# Altium PCB Rackmount_DSP.PcbDoc (part 18 of 24)
Units mil, origin at the board's own origin, x right, y up, seen from the top; angles counter-clockwise.
Board outline 10629.92 x 8267.72 mil, 4 copper layers (Top Layer, Mid Layer 1, Mid Layer 2, Bottom Layer), stack 36.2 mil thick; 4500 components, 1565 nets, 9765 pads, 3289 vias.
Unrouted connection lines stored in the file: 1.
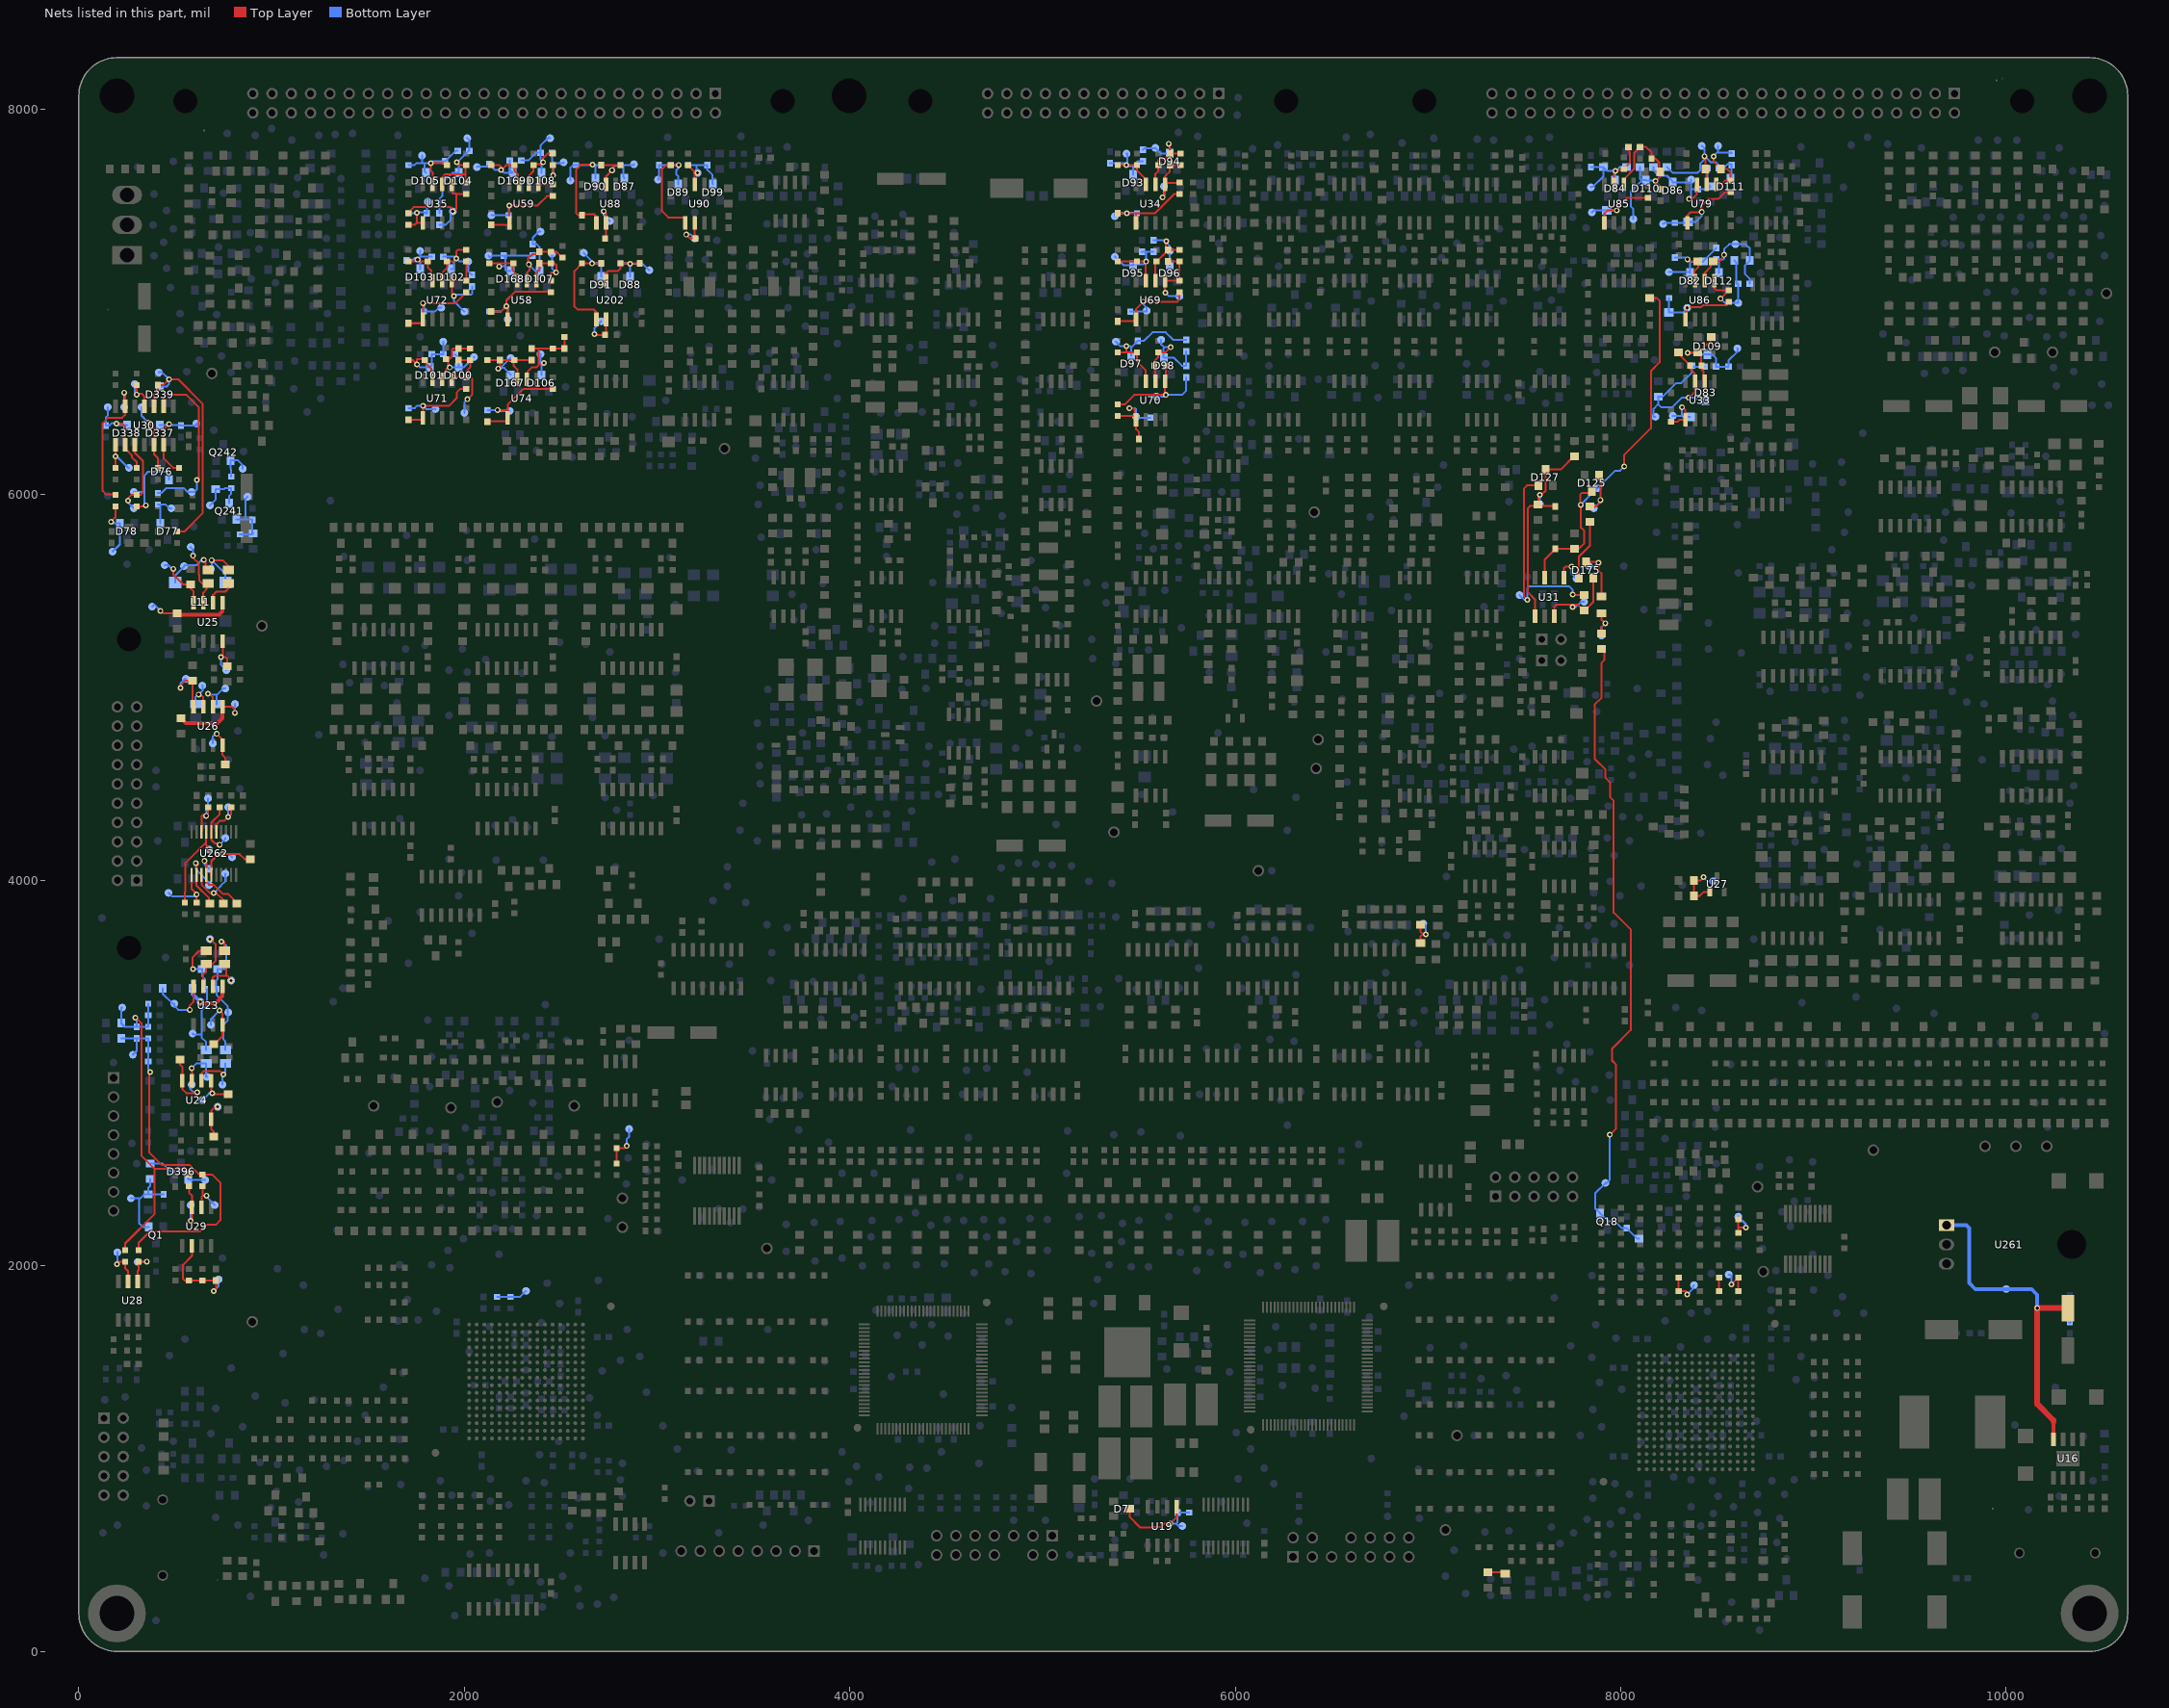
[diagram p20: the nets of this part, all layers, seen from the top]

## Via types
v1: diameter 30, hole 16, Top Layer to Bottom Layer, 3143 vias
v2: diameter 22, hole 12, Top Layer to Bottom Layer, 146 vias

## Nets (pads, with @x,y where several pads share a name; then routed paths per layer and width w, separated by ;. In a path a pad name is that pad's centre, name@x,y a point inside that pad or via, vN(x,y) a via of type N, cw(c..) or ccw(c..) an arc to the next point about the centre after c; other vN are vias at no path point) (continued)
XSIG082125: R893.1 TP944.1 U28.7 | length 214.3
  Top Layer w10: v1(197.95,2009.26) 208.7,2020 R893.1@240,2020 240,1988.52 255,1973.52 U28.7@255,1920
  Bottom Layer w10: v1(197.95,2009.26) 200,2011.3 TP944.1@200,2070
XSIG082126: R894.1 TP945.1 U28.6 | length 194.3
  Top Layer w10: U28.6@305,1920 305,1972.13 310,1977.13 R894.1@310,2020 350.4,2020 v1(352.66,2022.26)
  Bottom Layer w10: TP945.1@305,2020 350.4,2020 v1(352.66,2022.26)
XSIG082133: C518.1 R991.2 R992.2 TP946.1 U29.2 | length 497.9
  Top Layer w10: U29.2@586.63,2104.11 586.63,2051.32 540.63,2005.32 540.63,1931.56 548.07,1924.11 R991.2@571.63,1924.11 R992.2@641.63,1924.11 C518.1@711.63,1924.11 711.63,1881.26 v1(699.21,1868.85)
  Bottom Layer w10: v1(699.21,1868.85) 725,1894.63 TP946.1@725,1930
XSIG082140: R892.1 TP947.1 U29.7 | length 270.2
  Top Layer w10: R892.1@571.63,2414.11 571.63,2380.49 586.63,2365.49 U29.7@586.63,2304.11 586.63,2240.54 v1(580,2233.91)
  Bottom Layer w10: v1(580,2233.91) TP947.1@580,2315
XSIG082141: R891.1 TP948.1 U29.6 | length 200.5
  Top Layer w10: U29.6@636.63,2304.11 636.63,2357.09 643.65,2364.11 ; R891.1@641.63,2414.11 641.75,2414.11 641.75,2364.11 643.65,2364.11 ; v1(662.58,2364.11) 643.65,2364.11
  Bottom Layer w10: v1(662.58,2364.11) 662.58,2357.42 TP948.1@705,2315
XSIG082152: C431.1 C439.1 R867.1 R870.1 R892.2 R893.2 R1351.1 TP949.1 | length 1916.2
  Top Layer w10: R893.2@240,2080 240,2116.16 393.51,2269.67 393.51,2502.5 394.32,2502.5 ; v1(293.72,3286.97) 296.81,3286.97 324.82,3258.97 324.82,2572 394.32,2502.5 ; R892.2@571.63,2474.11 571.63,2489.51 558.64,2502.5 394.32,2502.5
  Bottom Layer w10: TP949.1@225,3340 221.86,3340 220,3338.14 R1351.1@220,3260 220,3257.5 237.5,3240 C439.1@300,3240 ; v1(293.72,3286.97) 300,3280.69 C439.1@300,3240 ; R867.1@360,3360 C431.1@360,3300 R870.1@360,3240 C439.1@300,3240
XSIG082161: C432.1 C439.2 R866.2 R869.2 R891.2 R894.2 R1350.1 TP950.1 | length 1973.8
  Top Layer w10: R894.2@310,2080 310,2119.13 369.88,2179.01 629.24,2179.01 663.03,2212.8 710.37,2212.8 733.83,2236.26 733.83,2431.97 691.69,2474.11 R891.2@641.63,2474.11 624.08,2474.11 575.55,2522.63 430.57,2522.63 365.94,2587.26 365.94,3005 v1(370.11,3005)
  Bottom Layer w10: R1350.1@220,3180 C439.2@300,3180 ; TP950.1@280,3095 300,3115 C439.2@300,3180 ; v1(370.11,3005) 360,3015.11 C432.1@360,3060 R869.2@360,3120 R866.2@360,3180 C439.2@300,3180
XSIG082179: C423.2 Q1.1 R961.1 R1378.1 TP951.1 | length 450.5
  Bottom Layer w10: TP951.1@270,2350 311.89,2350 ; Q1.1@362.5,2201.5 330.79,2201.5 312.73,2219.55 312.73,2349.16 311.89,2350 ; R961.1@370,2450 370,2415 360,2405 R1378.1@360,2370 ; C423.2@440,2370 R1378.1@360,2370 ; 311.89,2350 317.79,2350 337.79,2370 R1378.1@360,2370
XSIG082192: R2092.2 R2093.1 TP952.1 U27.1 | length 287.3
  Top Layer w10: v1(8429.39,4016.11) 8429.39,4014.39 8415,4000 R2093.1@8380,4000 R2092.2@8380,3920 8410.66,3920 8430.58,3939.92 U27.1@8462.6,3939.92
  Bottom Layer w10: v1(8429.39,4016.11) 8450.5,3995 TP952.1@8480,3995
XSIG082201: C329.2 D7.3 R759.2 TP953.1 U19.1 | length 574.2
  Top Layer w10: D7.3@5451.5,740 5451.5,697.97 5507.4,642.07 5572,642.07 5574.86,644.94 5612.91,644.94 5630.38,662.41 v1(5660.93,662.41) 5695,696.47 U19.1@5695,750
  Bottom Layer w10: v1(5660.93,662.41) 5693.65,662.41 ; TP953.1@5725,650 5706.06,650 5693.65,662.41 ; R759.2@5760,720 C329.2@5700,720 5700,668.75 5693.65,662.41
XSIG082216: D46.2 R1078.2 TP954.1 | length 184.1
  Top Layer w10: D46.2@6960,3673.5 6960,3708.5 6971.65,3720.15 v1@6973.93,3720.15 ; R1078.2@6960,3769.09 6960,3734.08 v1@6973.93,3720.15 ; v1(6988.49,3720.15) v1@6973.93,3720.15
  Bottom Layer w10: TP954.1@6975,3775 6975.99,3775 6988.49,3762.49 v1(6988.49,3720.15)
XSIG082219: D44.2 R864.1 | length 96.5
  Top Layer w10: R864.1@7310,410 7400,410 D44.2@7400,403.5
XSIG082226: C309.1 C916.1 R984.2 TP956.1 U16.8 U261.1 | length 1983.1
  Top Layer w9: 10244.96,1192.41 10245,1192.37
  Top Layer w20: U16.8@10245,1100 10245,1192.37
  Top Layer w30: 10244.96,1192.41 10244.96,1198.75 10161.2,1282.5 v1(10161.2,1780.24) C916.1@10320,1780.24
  Bottom Layer w20: U261.1@9690,2210 9793.12,2210 9807.26,2195.86 9807.26,1911.86 9839.12,1880 TP956.1@10000,1880 10131.3,1880 10161.2,1850.1 v1(10161.2,1780.24) 10284.24,1780.24 10294,1790 R984.2@10330,1790 C309.1@10330,1710
XSIG082228: D396.1 R961.2 TP1684.1 | length 334.2
  Bottom Layer w10: R961.2@370,2530 436.09,2530 476.09,2490 549.85,2490 567.5,2472.35 D396.1@567.5,2448.5 576.25,2448.5 579.75,2445 TP1684.1@655,2445
XSIG090590: R1311.2 TP1786.1 U24.4 | length 184.3
  Top Layer w10: R1311.2@700,2670 699.29,2670 699.29,2697.34 686.63,2710 U24.4@686.63,2760 686.63,2803.45 703.82,2820.64 720,2820.64 v1(720,2825)
XSIG090624: R2714.2 TP1899.1 U262.4 | length 370.3
  Top Layer w10: v1(651.26,4100.68) 661.61,4090.32 U262.4@661.61,4028.39 661.61,3990.76 674.99,3977.39 698.86,3977.39 746.51,3929.74 772.54,3929.74 820,3882.28 R2714.2@820,3880
  Bottom Layer w10: v1(651.26,4100.68) 651.26,4083.74 TP1899.1@675,4060
XSIG090625: R2713.2 TP1805.1 U262.5 | length 358.3
  Top Layer w10: U262.5@687.2,4028.39 687.2,4099 721.13,4132.92 744.69,4132.92 v1(744.69,4136.01) 833.72,4136.01 859.73,4110 R2713.2@890,4110
  Bottom Layer w10: v1(744.69,4136.01) 778.99,4136.01 TP1805.1@795,4120
XSIG090637: R2709.1 TP1804.1 U262.18 | length 253.1
  Top Layer w10: U262.18@636.02,4251.61 636.02,4332.43 643.44,4339.85 v1@660.48,4339.85 ; v1(660.48,4334.88) v1@660.48,4339.85 ; R2709.1@670,4380 670,4351.23 660.48,4341.71 v1@660.48,4339.85
  Bottom Layer w10: v1(660.48,4334.88) 663.26,4334.88 663.26,4374.02 670,4380.76 TP1804.1@670,4425
XSIG090638: R2710.1 TP1803.1 U262.17 | length 459.2
  Top Layer w10: R2710.1@550,3885 550,3940.38 553.39,3943.77 553.39,4090.86 660.63,4198.1 ; U262.17@661.61,4251.61 660.63,4251.61 660.63,4198.1 ; v1(675,4160) 675,4162.5 672.04,4162.5 672.04,4172.41 660.63,4183.82 660.63,4198.1
XSIG090639: R2711.1 TP1802.1 U262.16 | length 292.8
  Top Layer w10: R2711.1@730,4380 730,4342.45 687.2,4299.66 U262.16@687.2,4251.61 687.2,4209.33 705.04,4191.5 730.78,4191.5 v1(730.78,4185.06)
  Bottom Layer w10: v1(730.78,4185.06) 760,4214.28 TP1802.1@760,4220
XSIG090647: R1313.2 TP1798.1 U262.2 | length 391
  Top Layer w10: v1(606.11,4089.56) 607.45,4089.56 607.45,4090.27 617.13,4080.58 610.43,4073.88 U262.2@610.43,4028.39 610.43,3971.73 674.9,3907.27 674.9,3885.1 R1313.2@680,3880
  Bottom Layer w10: v1(606.11,4089.56) 606.11,4057.37 675,3988.48 TP1798.1@675,3975
XSIG090648: R2720.2 TP1799.1 U262.1 | length 312.3
  Top Layer w10: U262.1@584.84,4028.39 584.84,3955.14 611.95,3928.04 v1(610.94,3927.03) 610,3926.09 R2720.2@610,3885
  Bottom Layer w10: TP1799.1@465,3935 482.21,3917.79 601.7,3917.79 v1(610.94,3927.03)
XSIG090652: L14.2 L19.2 R1346.2 R1353.1 TP1900.1 | length 732.9
  Top Layer w10: v1(740.01,3681.93) 740.01,3687.02 744.95,3687.02 755,3676.97 L14.2@755,3634.5
  Bottom Layer w10: v1(740.01,3681.93) 740.01,3685.28 765.05,3660.23 765.05,3545.72 759.33,3540 R1353.1@720,3540 720,3488 712.7,3480.7 712.7,3435 R1346.2@715,3435 715,3404.28 773.11,3346.18 TP1900.1@773.11,3315 ; L19.2@760,3119.5 760,3163.83 750,3173.83 750,3250.63 773.11,3273.74 TP1900.1@773.11,3315 ; TP1900.1@775,3315 TP1900.1@773.11,3315
XSIG090659: R2715.2 TP1797.1 U262.3 | length 341.6
  Top Layer w10: U262.3@636.02,4028.39 636.02,3977.39 678.92,3934.49 699.24,3934.49 v1(700.1,3933.63) 713.53,3933.63 750,3897.15 R2715.2@750,3880
  Bottom Layer w10: v1(700.1,3933.63) 736.94,3970.47 736.94,3972.19 760,3995.25 TP1797.1@760,4035
XSIG090673: R1312.2 TP1796.1 U23.4 | length 293.4
  Top Layer w10: R1312.2@700,3150 702.5,3150 745,3192.5 U23.4@745,3250 745,3308.43 v1(729.21,3324.22)
  Bottom Layer w10: TP1796.1@685,3250 685,3280.01 v1(729.21,3324.22)
XSIG090685: R2717.1 TP1878.1 U24.8 | length 330.8
  Top Layer w10: R2717.1@525,3070 525,3043.71 536.63,3032.08 U24.8@536.63,2960 536.63,2916.56 557.58,2895.6 613.65,2895.6 v1(613.65,2900.18)
  Bottom Layer w10: TP1878.1@585,2940 576.69,2931.69 576.69,2919.28 605.17,2890.8 613.65,2890.8 v1(613.65,2900.18)
XSIG090687: R2719.1 TP1879.1 U23.8 | length 342.5
  Top Layer w10: v1(575.77,3328.2) 574.67,3328.2 574.67,3350.93 575.04,3350.93 595,3370.89 U23.8@595,3450
  Bottom Layer w10: R2719.1@435,3440 435,3410.46 485.46,3360 TP1879.1@495,3360 495,3348.85 515.65,3328.2 v1(575.77,3328.2)
XSIG090692: R2712.1 TP1880.1 U262.15 | length 234
  Top Layer w10: U262.15@712.8,4251.61 712.8,4289.24 731.85,4308.29 753.68,4308.29 v1(774.89,4329.51) 780.08,4329.51 780.08,4334.03 790,4343.95 R2712.1@790,4380
  Bottom Layer w10: v1(774.89,4329.51) 780.08,4329.51 775,4334.59 TP1880.1@775,4380
XSIG090710: L16.1 TP1801.1 U24.7 | length 226.2
  Top Layer w10: v1(585.73,3025.9) 586.63,3025.01 U24.7@586.63,2960
  Bottom Layer w10: v1(585.73,3025.9) 610.33,3050.5 L16.1@660,3050.5 660,2980 TP1801.1@665,2980
XSIG090711: L19.1 TP1800.1 U24.6 | length 281.1
  Top Layer w10: U24.6@636.63,2960 636.63,2999.79 646.84,3010 732.59,3010 v1(749.86,2992.74)
  Bottom Layer w10: TP1800.1@745,2940 745,2987.88 v1(749.86,2992.74) 760,3002.88 L19.1@760,3050.5
XSIG090714: L15.2 L16.2 R1346.1 R1352.1 TP1901.1 | length 711.3
  Top Layer w10: v1(592.37,3540.32) 592.37,3539.23 589.41,3539.23 589.41,3599.27 624.64,3634.5 L15.2@660,3634.5
  Bottom Layer w10: TP1901.1@590,3205 595.14,3199.86 636.9,3199.86 ; v1(592.37,3540.32) 592.37,3539.23 589.41,3539.23 590.18,3540 R1352.1@640,3540 640,3501.55 655,3486.55 R1346.1@655,3435 665.07,3435 665.07,3352.49 636.9,3324.32 636.9,3199.86 ; L16.2@660,3119.5 660,3161.09 636.9,3184.2 636.9,3199.86
XSIG090715: L15.1 TP1902.1 U23.7 | length 305.9
  Top Layer w10: U23.7@645,3450 645,3513.5 660,3528.5 L15.1@660,3565.5 693.35,3565.5 708.86,3581.01 708.86,3668.86 685.13,3692.59 680,3692.59 v1(680,3695)
XSIG090716: L14.1 TP1903.1 U23.6 | length 226.2
  Top Layer w10: U23.6@695,3450 695,3496.35 702.67,3504.02 765.26,3504.02 765.51,3504.27 ; L14.1@755,3565.5 765.51,3554.99 765.51,3504.27 ; v1(790,3480) 791.15,3480 791.15,3486.22 773.1,3504.27 765.51,3504.27
XSIG090719: R3009.1 TP1926.1 U24.5 | length 219.1
  Top Layer w10: U24.5@686.63,2960 686.63,2901 v1(692.76,2894.87) 697.63,2890 R3009.1@775,2890
  Bottom Layer w10: TP1926.1@640,2860 674.87,2894.87 v1(692.76,2894.87)
XSIG090722: R3010.1 TP1927.1 U23.5 | length 278.3
  Top Layer w10: v1@628.39,3372.41 628.39,3370 v1(630,3370)
  Top Layer w20: v1@628.39,3372.41 637.94,3362.85 709.19,3362.85 745,3398.66 U23.5@745,3450
  Bottom Layer w10: TP1927.1@628.39,3372.41 628.39,3370 v1(630,3370)
  Bottom Layer w20: R3010.1@590,3440 590,3410.79 TP1927.1@628.39,3372.41
XSIG100686: R719.1 R1009.2 TP966.1 | length 181.9
  Top Layer w10: R1009.2@8610,2170 8610,2198.16 ; R719.1@8610,2240 8610,2198.16 ; v1(8648.92,2198.16) 8610,2198.16
  Bottom Layer w10: TP966.1@8610,2255 8648.92,2216.08 v1(8648.92,2198.16)
XSIG100765: R661.2 R1065.2 TP974.1 | length 230.4
  Top Layer w10: R1065.2@2790,2530 R661.2@2790,2610 2830.13,2610 v1(2842.27,2622.15)
  Bottom Layer w10: v1(2842.27,2622.15) 2842.27,2657.21 2855,2669.94 TP974.1@2855,2710
XSIG100766: R662.2 R1066.2 TP975.1 | length 162.4
  Bottom Layer w10: R662.2@2170,1840 R1066.2@2240,1840 2290,1840 TP975.1@2320,1870
XSIG100863: R709.1 R1006.2 TP968.1 | length 191.4
  Top Layer w10: R709.1@8300,1940 R1006.2@8300,1870 8336.22,1870 8344.76,1861.46 v1(8344.76,1851.52)
  Bottom Layer w10: v1(8344.76,1851.52) 8374.05,1880.81 8374.05,1894.12 8379.93,1900 TP968.1@8380,1900
XSIG100864: R692.1 R1007.2 TP1904.1 | length 180.3
  Top Layer w10: v1(8574.37,1904.37) R692.1@8610,1940 R1007.2@8610,1870
  Bottom Layer w10: TP1904.1@8560,1955 8565.69,1955 8574.37,1946.32 v1(8574.37,1904.37)
XSIG100865: R705.1 R1008.2 | length 70
  Top Layer w10: R1008.2@8510,1870 R705.1@8510,1940
XSIG110033: R1480.2 TP979.1 U30.10 | length 420.3
  Top Layer w10: v1(254.63,5970.1) 254.63,5980.33 274.31,6000 R1480.2@300,6000 321.99,6000 332.42,6010.43 332.42,6176.41 290,6218.83 U30.10@290,6260
  Bottom Layer w10: v1(254.63,5970.1) 254.63,5960.37 TP979.1@285,5930
XSIG110034: D76.1 R1480.1 TP94.1 | length 436.7
  Top Layer w10: R1480.1@300,5940 341.4,5940 v1(347.15,5945.75)
  Bottom Layer w10: TP94.1@285,6015 339.24,6015 ; v1(347.15,5945.75) 339.24,5945.75 339.24,6015 ; D76.1@467.5,6078.5 467.5,6108.42 456.03,6119.89 360.06,6119.89 339.5,6099.34 339.5,6015 339.24,6015
XSIG110039: R871.2 TP1668.1 U30.12 | length 350.2
  Top Layer w10: v1(359.69,6374.79) 390,6344.48 U30.12@390,6260 390,6210 410,6190 R871.2@410,6140
  Bottom Layer w10: TP1668.1@325,6455 325,6409.48 v1(359.69,6374.79)
XSIG110040: C433.1 D337.3 R1482.2 TP980.1 U30.13 | length 502
  Top Layer w10: v1(468.23,6366.48) 469.05,6366.48 468.41,6367.12 438.36,6337.06 438.36,6260 U30.13@440,6260 440,6236.5 440.5,6236 440.5,6187.57 488.07,6140 R1482.2@520,6140
  Bottom Layer w10: D337.3@420,6361.5 467.94,6361.5 v1@469.05,6362.62 ; v1(468.23,6366.48) 469.05,6366.48 v1@469.05,6362.62 ; TP980.1@610,6370 610,6360 C433.1@530,6360 530,6361.71 470.86,6361.71 469.96,6362.62 v1@469.05,6362.62
XSIG110046: R1481.2 TP93.1 U30.2 | length 918.2
  Top Layer w10: U30.2@440,6460 440,6497.69 461.87,6519.56 556.23,6519.56 621.42,6454.36 621.42,6077.23 v1(611.92,6077.23)
  Bottom Layer w10: R1481.2@410,6010 429.94,6010 454.94,6035 542.81,6035 563.23,6014.59 585,6014.59 TP93.1@585,6015 599.61,6015 611.46,6026.86 611.46,6077.23 v1(611.92,6077.23)
XSIG110047: D77.1 R1481.1 TP981.1 | length 176.8
  Bottom Layer w10: R1481.1@410,5950 R1481.1@422.5,5950 ; D77.1@422.5,5851.5 R1481.1@422.5,5950 ; TP981.1@480,5930 468.41,5930 448.41,5950 R1481.1@422.5,5950
XSIG110053: R872.2 TP982.1 U30.4 | length 206.5
  Top Layer w10: v1(299.61,6520) 299.61,6526.68 v1@300,6527.07 ; R872.2@300,6570 v1@300,6527.07 ; U30.4@340,6460 340,6510.54 326.04,6524.5 302.57,6524.5 v1@300,6527.07
  Bottom Layer w10: TP982.1@290,6575 290,6529.61 v1(299.61,6520)
XSIG110054: C434.1 D339.3 R1483.2 TP983.1 U30.3 | length 1303.3
  Top Layer w10: U30.3@390,6460 390,6517.5 410,6537.5 C434.1@410,6570 439.24,6570 v1(468.32,6599.07) 515.7,6599.07 641.92,6472.85 641.92,5904.14 547.79,5810 R1483.2@510,5810
  Bottom Layer w10: TP983.1@415,6635 415,6635.39 417.32,6637.7 429.69,6637.7 v1(468.32,6599.07) 468.56,6599.07 468.56,6575.06 455,6561.5 D339.3@420,6561.5
XSIG110060: R1479.2 TP984.1 U30.6 | length 753.3
  Top Layer w10: R1479.2@190,6000 189,6000 187.17,6001.83 141.52,6001.83 123.21,6020.13 123.21,6371.16 151.81,6399.77 224.36,6399.77 240,6415.41 U30.6@240,6460 240,6525.18 v1(235,6530.18)
  Bottom Layer w10: TP984.1@235,6455 v1(235,6530.18)
XSIG110061: D78.1 R1479.1 TP985.1 | length 300.9
  Top Layer w10: v1(166.87,5859.78) 190,5882.92 R1479.1@190,5940
  Bottom Layer w10: v1(166.87,5859.78) 169.22,5859.78 177.5,5851.5 D78.1@212.5,5851.5 212.5,5742.5 TP985.1@175,5705
XSIG110067: R873.2 TP986.1 U30.8 | length 215.6
  Top Layer w10: R873.2@190,6140 190,6170 189.67,6170 v1(189.67,6200) 190,6200.33 U30.8@190,6260
  Bottom Layer w10: v1(189.67,6200) 195.15,6200 255.15,6140 TP986.1@260,6140
XSIG110068: C435.1 D338.3 R1484.2 TP987.1 U30.9 | length 508.9
  Top Layer w10: v1(195.87,6369.77) 225.87,6369.77 240,6355.63 U30.9@240,6260 240,6240.01 276.15,6203.86 276.15,6193.85 300,6170 R1484.2@300,6140
  Bottom Layer w10: TP987.1@150,6455 150,6411.25 140,6401.25 C435.1@140,6360 159.15,6360 169.92,6370.77 v1@195.87,6370.77 ; v1(195.87,6369.77) v1@195.87,6370.77 ; D338.3@250,6361.5 205.13,6361.5 v1@195.86,6370.77
XSIG110115: R2718.1 TP1862.1 U25.8 | length 303.2
  Top Layer w10: v1(489.59,5615.9) 489.59,5587.56 542.15,5535 R2718.1@580,5535 580,5513.81 595,5498.81 U25.8@595,5440
  Bottom Layer w10: TP1862.1@445,5635 464.17,5635 489.59,5609.58 v1(489.59,5615.9)
XSIG110133: R1309.2 TP1861.1 U25.4 | length 242.6
  Top Layer w10: U25.4@745,5240 747.1,5240 747.1,5167.6 737.34,5157.83 v1(737.34,5157.5) 761.14,5157.5 770,5148.64 R1309.2@770,5110
  Bottom Layer w10: v1(737.34,5157.5) 737.34,5117.66 TP1861.1@765,5090
XSIG110161: R2716.1 TP1881.1 U26.8 | length 284.3
  Top Layer w10: v1(527.97,4998.41) 527.97,5011.23 551.74,5035 R2716.1@590,5035 590,4905 U26.8@595,4900
  Bottom Layer w10: v1(527.97,4998.41) 527.97,5024.05 550.32,5046.4 551.72,5045 TP1881.1@555,5045
XSIG110170: R1307.2 TP1859.1 U26.4 | length 245.1
  Top Layer w10: v1(715.65,4760.02) 745,4730.67 U26.4@745,4700 745,4650 760,4635 R1307.2@760,4600
  Bottom Layer w10: TP1859.1@695,4710 695,4747.52 711.57,4764.1 v1(715.65,4760.02)
XSIG110177: L18.1 TP1905.1 U25.7 | length 354.4
  Top Layer w10: v1(591.58,5683.81) 591.58,5674.78 621.14,5645.22 621.14,5586.5 625.04,5582.61 625.04,5554.53 639.07,5540.5 L18.1@663.5,5540.5 ; U25.7@645,5440 645,5492.38 663.2,5510.58 663.2,5540.2 L18.1@663.5,5540.5 ; L18.1@670,5540.5 L18.1@663.5,5540.5
  Bottom Layer w10: TP1905.1@580,5730 578.34,5728.34 591.58,5715.11 v1(591.58,5683.81)
XSIG110178: L17.1 U25.6 | length 160.6
  Top Layer w10: U25.6@695,5440 695,5479.07 713.48,5497.55 759.53,5497.55 775,5513.03 L17.1@775,5540.5
XSIG110179: L11.6 L18.2 TP1906.1 | length 302.4
  Top Layer w10: v1(648.37,5662.84) 648.37,5665.42 656.54,5665.42 656.54,5616.46 663.5,5609.5 L18.2@670,5609.5
  Bottom Layer w10: L11.6@499.29,5545 499.29,5579.93 547.18,5627.82 TP1906.1@545,5630 550,5635 610.1,5635 640.51,5665.42 648.37,5665.42 v1(648.37,5662.84)
XSIG110180: L11.1 L17.2 TP1907.1 | length 314.1
  Top Layer w10: v1(688.87,5661.06) 745.06,5661.06 775,5631.11 L17.2@775,5609.5
  Bottom Layer w10: TP1907.1@685,5615 685,5617.94 688.87,5621.81 v1(688.87,5661.06) 710.08,5639.84 710.87,5639.84 760.71,5590 L11.1@760.71,5545
XSIG110190: L13.1 TP1908.1 U26.7 | length 194.7
  Top Layer w10: v1(621.43,4964.26) 630.74,4964.26 645,4950 U26.7@645,4900
  Bottom Layer w10: L13.1@605,4914.5 605,4951.5 617.76,4964.26 v1(621.43,4964.26) 642.27,4985.1 642.27,5009.8 642.06,5010 TP1908.1@640,5010
XSIG110191: L12.1 TP1909.1 U26.6 | length 239.9
  Top Layer w10: v1(669.74,4967.68) 677.32,4967.68 695,4950 U26.6@695,4900
  Bottom Layer w10: v1(669.74,4967.68) 669.74,4962.15 715,4962.15 ; L12.1@715,4914.5 715,4962.15 ; TP1909.1@760,4995 747.33,4995 715,4962.67 715,4962.15
XSIG110212: Q242.1 R2727.2 TP1910.1 | length 175.9
  Bottom Layer w10: R2727.2@790,6095 790,6131.25 787.5,6133.75 Q242.1@787.5,6178.5 825,6178.5 850,6153.5 TP1910.1@850,6135
XSIG110213: C1178.2 Q241.1 R2726.2 R2732.2 TP1911.1 | length 351.4
  Bottom Layer w10: Q241.1@817.5,5873.5 865.5,5873.5 ; R2726.2@835,5795 900,5795 R2732.2@900,5800 ; TP1911.1@875,5990 865.5,5980.5 865.5,5873.5 ; R2732.2@905,5800 R2732.2@900,5800 ; 865.5,5873.5 900,5873.5 C1178.2@900,5870 R2732.2@900,5800
XSIG110220: Q241.3 R2727.1 R2733.1 TP1912.1 | length 262.1
  Bottom Layer w10: TP1912.1@680,5945 710,5975 R2733.1@710,6030 754,6030 759,6035 R2727.1@790,6035 790,6005 780,5995 Q241.3@780,5956.5
XSIG110243: R3015.1 TP1929.1 U26.5 | length 426.5
  Top Layer w10: U26.5@745,4900 794.57,4900 810,4884.57 v1(810,4869.49)
  Top Layer w20: R3015.1@530,4840 553.97,4816.03 720.45,4816.03 745,4840.58 U26.5@745,4900
  Bottom Layer w10: v1(810,4869.49) TP1929.1@810,4915
XSIG110245: R3016.1 TP1928.1 U25.5 | length 444.1
  Top Layer w10: v1(423.55,5397.83) 436.37,5385 R3016.1@510,5385
  Top Layer w20: R3016.1@510,5385 517.61,5377.39 727.91,5377.39 745,5394.48 U25.5@745,5440
  Bottom Layer w10: TP1928.1@380,5420 390.69,5430.69 v1(423.55,5397.83)
XSIG120017: C1201.2 C1202.1 D94.3 R803.1 R804.2 TP989.1 U34.2 | length 522.8
  Top Layer w10: U34.2@5585,7610 5585,7665 5600,7680 R804.2@5600,7710 5600,7734.94 5604.72,7739.66 5629.66,7739.66 C1202.1@5660,7770 ; v1(5655.04,7821.28) 5660,7816.32 C1202.1@5660,7770 ; R803.1@5715,7770 C1202.1@5660,7770
  Bottom Layer w10: C1201.2@5520,7790 5528.18,7798.18 TP989.1@5586.82,7798.18 ; TP989.1@5585,7800 TP989.1@5586.82,7798.18 ; v1(5655.04,7821.28) 5660,7816.32 D94.3@5660,7771.5 5613.5,7771.5 TP989.1@5586.82,7798.18
XSIG120033: C1203.1 C1204.1 D95.3 R805.2 R806.1 TP990.1 U69.3 | length 550.2
  Top Layer w10: R806.1@5390,7210 R805.2@5490,7210 v1@5535,7210 ; U69.3@5535,7110 v1@5535,7210 ; v1(5537.44,7210) v1@5535,7210
  Bottom Layer w10: TP990.1@5375,7235 5376.21,7235 5419.71,7191.5 D95.3@5470,7191.5 5470,7194.78 5522.33,7194.78 5530.92,7203.37 5530.92,7203.49 v1(5537.44,7210) 5537.44,7253.66 5543.78,7260 ; C1203.1@5515,7260 5543.78,7260 ; C1204.1@5575,7260 5543.78,7260
XSIG120036: C1204.2 C1205.1 D96.3 R807.1 R808.2 TP991.1 U69.2 | length 505
  Top Layer w10: U69.2@5585,7110 5585,7205 R808.2@5590,7210 5591.5,7210 5650,7268.5 C1205.1@5650,7270 ; v1(5642.19,7316.4) 5640.01,7316.4 5640.01,7310 5640.01,7279.99 C1205.1@5650,7270 ; R807.1@5710,7270 C1205.1@5650,7270
  Bottom Layer w10: C1204.2@5575,7320 5630.01,7320 v1@5640.01,7310 ; v1(5642.19,7316.4) 5640.01,7316.4 v1@5640.01,7310 ; D96.3@5660,7191.5 TP991.1@5660,7265 5660,7290.01 v1@5640.01,7310
XSIG120053: C1206.1 C1207.1 D97.3 R809.2 R810.1 TP992.1 U70.3 | length 768.3
  Top Layer w10: R810.1@5390,6740 5435.2,6740 ; v1(5435.2,6770.96) 5435.2,6752.58 5435.2,6740 ; U70.3@5535,6590 5535,6645.79 5490,6690.79 R809.2@5490,6740 5435.2,6740
  Bottom Layer w10: TP992.1@5380,6795 5404.04,6770.96 v1(5435.2,6770.96) 5454.34,6770.96 5460,6765.3 ; D97.3@5460,6721.5 5460,6765.3 ; C1207.1@5745,6805 5744.93,6805.07 5676.95,6805.07 5639.39,6842.63 5569.98,6842.63 5527.35,6800 C1206.1@5495,6800 5494.7,6800 5460,6765.3
XSIG120058: C1208.2 R811.2 R1497.1 TP994.1 U70.1 | length 662.8
  Top Layer w10: R1497.1@5390,6470 5427.56,6470 5475.9,6518.34 v1(5640.14,6518.34) 5635,6523.49 U70.1@5635,6590 5640,6595 R811.2@5640,6670
  Bottom Layer w10: TP994.1@5590,6510 5631.8,6510 v1(5640.14,6518.34) 5722.24,6518.34 5745,6541.11 C1208.2@5745,6610
XSIG120071: C362.2 D99.3 R1596.2 R2336.1 TP995.1 U90.3 | length 410.5
  Top Layer w10: R2336.1@3160,7710 3190.84,7679.16 v1@3204.05,7679.16 ; U90.3@3195,7610 3195,7670 v1@3204.05,7670 ; 3195,7670.11 v1@3204.05,7679.16 ; v1(3210,7670) v1@3204.05,7670 ; v1@3204.05,7670 v1@3204.05,7679.16
  Bottom Layer w10: R1596.2@3160,7710 3203.21,7710 3204.05,7709.16 ; v1(3210,7670) 3204.05,7670 3204.05,7709.16 ; D99.3@3290,7611.5 3287.22,7614.28 3287.22,7659.45 3260,7686.67 C362.2@3260,7710 3204.89,7710 3204.05,7709.16
XSIG120098: C364.2 D88.3 R1598.2 R2338.1 TP996.1 U202.3 | length 483.7
  Top Layer w10: U202.3@2735,7110 2735,7150.6 2745.16,7160.76 2795.73,7160.76 2810,7175.03 R2338.1@2810,7200 v1@2860,7200 ; v1(2860,7197.77) v1@2860,7200 ; C364.2@2910,7200 v1@2860,7200
  Bottom Layer w10: R1598.2@2810,7200 2857.77,7200 v1(2860,7197.77) ; D88.3@2860,7131.5 v1(2860,7197.77) ; TP996.1@2960,7165 2958.62,7165 2925.85,7197.77 v1(2860,7197.77)
XSIG120108: C363.2 D87.3 R1597.2 R2337.1 TP997.1 U88.3 | length 427.2
  Top Layer w10: C363.2@2710,7710 2774.64,7710 ; U88.3@2735,7610 2735,7652.43 v1(2766.29,7683.72) 2774.64,7683.72 2774.64,7710 ; R2337.1@2810,7710 2774.64,7710
  Bottom Layer w10: v1(2766.29,7683.72) 2766.29,7693.36 2780.83,7707.9 2806.9,7707.9 2809,7710 R1597.2@2810,7710 R1597.2@2824.76,7710 ; D87.3@2830,7641.5 2830,7645 2824.76,7650.24 R1597.2@2824.76,7710 ; TP997.1@2880,7715 2880,7710 R1597.2@2824.76,7710
XSIG120125: C427.2 R1522.2 R1548.1 TP998.1 U34.5 | length 542.8
  Top Layer w10: C427.2@5390,7460 v1(5437.7,7460) 5485,7460 ; U34.5@5485,7410 5485,7460 ; R1522.2@5710,7560 5682.12,7560 5582.12,7460 5485,7460
  Bottom Layer w10: TP998.1@5375,7445 5375,7455.43 5379.57,7460 v1(5437.7,7460) 5437.7,7462.04 5490,7462.04 R1548.1@5490,7460
XSIG120126: C1202.2 R803.2 R1522.1 TP999.1 U34.1 | length 372.1
  Top Layer w10: v1(5623.25,7543.77) 5635,7555.52 U34.1@5635,7610 U34.1@5635,7618.4 ; R1522.1@5710,7620 5710,7618.4 U34.1@5635,7618.4 ; R803.2@5715,7710 C1202.2@5660,7710 5660,7676.47 5641.95,7658.42 5635,7651.47 U34.1@5635,7618.4
  Bottom Layer w10: v1(5623.25,7543.77) 5630,7550.52 TP999.1@5630,7600
XSIG120131: C1205.2 R807.2 R1549.1 TP1000.1 U69.1 | length 378.1
  Top Layer w10: v1(5637.07,7048.24) 5635,7050.31 U69.1@5635,7110 R1549.1@5710,7110 R807.2@5710,7210 C1205.2@5650,7210
  Bottom Layer w10: v1(5637.07,7048.24) 5655.31,7030 TP1000.1@5710,7030
XSIG120132: C428.2 R1523.1 R1549.2 TP1001.1 U69.5 | length 585.4
  Top Layer w10: C428.2@5390,6900 5485,6900 U69.5@5485,6910 5485,6964.01 v1(5522.97,7001.98) 5699.07,7001.98 5710,7012.91 R1549.2@5710,7050
  Bottom Layer w10: R1523.1@5455,6950 5540,6950 TP1001.1@5540,6955 5540,6970.44 5522.97,6987.47 v1(5522.97,7001.98)
XSIG120134: C361.2 R1497.2 R1577.1 TP1002.1 U70.5 | length 439.3
  Top Layer w10: R1497.2@5390,6410 U70.5@5478.5,6410 ; v1(5450.93,6449.03) 5471.43,6449.03 5478.5,6441.96 U70.5@5478.5,6410 ; C361.2@5500,6290 5500,6325 5485,6340 U70.5@5485,6390 5478.5,6390 U70.5@5478.5,6410
  Bottom Layer w10: v1(5450.93,6449.03) 5480.76,6449.03 5485,6444.79 TP1002.1@5485,6405 5485,6400 R1577.1@5560,6400
XSIG120146: C1200.1 C1201.1 D93.3 R801.2 R802.1 TP988.1 U34.3 | length 519.6
  Top Layer w10: R802.1@5390,7710 v1(5434.95,7710) R801.2@5490,7710 5490,7681.25 5535,7636.25 U34.3@5535,7610
  Bottom Layer w10: C1200.1@5350,7720 5350,7721.61 v1@5434.95,7721.61 ; TP988.1@5435,7770 5439.69,7770 5439.69,7721.61 v1@5434.95,7721.61 ; D93.3@5470,7661.5 5470,7705.76 ; C1201.1@5520,7730 5491.4,7730 5470,7708.6 5470,7705.76 ; v1@5434.95,7721.61 v1(5434.95,7710) 5435.46,7709.49 5435.46,7705.76 5470,7705.76
XSIG120159: C1207.2 C1208.1 D98.3 R811.1 R812.2 TP993.1 U70.2 | length 579.7
  Top Layer w10: U70.2@5585,6590 5585,6665 R811.1@5580,6670 5580,6694.53 5600,6714.53 R812.2@5600,6740 5638.59,6740 v1(5663.93,6765.34)
  Bottom Layer w10: TP993.1@5615,6805 5615,6779.36 5630.25,6764.11 5632.49,6764.11 ; v1(5663.93,6765.34) 5633.72,6765.34 5632.49,6764.11 ; C1207.2@5745,6745 C1208.1@5745,6670 5723.04,6670 5681.54,6711.5 D98.3@5630,6711.5 5626.73,6714.77 5626.73,6758.35 5632.49,6764.11
XSIG130009: C1209.1 C1210.1 D101.3 R815.2 R816.1 TP1006.1 U71.3 | length 511.8
  Top Layer w10: R816.1@1710,6700 1731.02,6700 v1(1754.46,6676.56) 1754.46,6702.72 1792.28,6702.72 R815.2@1795,6700 1795,6687.52 1828.5,6654.02 1828.5,6600 U71.3@1835,6600
  Bottom Layer w10: v1(1754.46,6676.56) 1769.52,6661.5 D101.3@1820,6661.5 1830,6671.5 C1209.1@1830,6730 C1210.1@1890,6730 TP1006.1@1890,6795
XSIG130010: C1210.2 C1211.1 D100.3 R813.1 R814.2 TP1007.1 U71.2 | length 530.7
  Top Layer w10: U71.2@1885,6600 1885,6623.5 1907.11,6645.61 1907.11,6651.8 1915.98,6660.67 v1(1924.6,6660.67) 1916,6669.27 R814.2@1916,6707.61 ; R814.2@1905,6705 1905,6707.61 R814.2@1916,6707.61 ; R813.1@2030,6760 C1211.1@1970,6760 1970,6759.33 1943.46,6759.33 1936.99,6752.86 1936.99,6718.77 1925.82,6707.61 R814.2@1916,6707.61
  Bottom Layer w10: v1(1924.6,6660.67) 1924.6,6658.08 1931.58,6658.08 1935,6661.5 D100.3@1970,6661.5 ; C1210.2@1950,6730 1970,6710 D100.3@1970,6661.5 ; TP1007.1@2050,6715 1996.5,6661.5 D100.3@1970,6661.5
XSIG130014: C1211.2 R813.2 R1567.1 TP1008.1 U71.1 | length 471.9
  Top Layer w10: U71.1@1935,6600 1935,6611.39 R1567.1@2010,6611.39 ; C1211.2@1970,6700 R813.2@2030,6700 2030,6660.36 2010,6640.36 R1567.1@2010,6611.39 ; v1(2016.44,6495.79) 2041,6520.35 2041,6600.11 2031.11,6610 R1567.1@2010,6610 R1567.1@2010,6611.39
  Bottom Layer w10: TP1008.1@2000,6425 2000,6479.35 v1(2016.44,6495.79)
XSIG130027: C1212.1 C1213.1 D103.3 R819.2 R820.1 TP1009.1 U72.3 | length 461.8
  Top Layer w10: R820.1@1710,7210 1746.64,7210 v1@1755.24,7218.61 ; v1(1757.32,7220.05) 1755.24,7220.05 v1@1755.24,7218.61 ; U72.3@1835,7110 1828.5,7110 1828.5,7161.5 1810,7180 R819.2@1810,7210 1763.85,7210 v1@1755.24,7218.61
  Bottom Layer w10: C1212.1@1700,7215 1727.79,7215 1741.39,7228.61 1755.24,7228.61 1755.24,7220.05 v1(1757.32,7220.05) v1@1760.56,7223.29 ; D103.3@1770,7171.5 1770,7213.85 v1@1760.56,7223.29 ; TP1009.1@1770,7265 1770,7237.26 1772.26,7235 ; C1213.1@1830,7235 1772.26,7235 ; v1@1760.56,7223.29 1772.26,7235
XSIG130029: C1213.2 C1214.1 D102.3 R817.1 R818.2 TP1010.1 U72.2 | length 555.8
  Top Layer w10: U72.2@1885,7110 1885,7152.26 1910,7177.26 R818.2@1910,7210 1950,7210 1959.06,7219.06 v1(1959.06,7226.17) 1959.06,7264.23 1964.84,7270 R817.1@2010,7270
  Bottom Layer w10: C1213.2@1890,7235 1950.23,7235 v1(1959.06,7226.17) ; D102.3@1930,7171.5 1945,7171.5 1945,7210 1959.06,7224.06 v1(1959.06,7226.17) ; C1214.1@2040,7140 2020,7160 TP1010.1@2020,7210 1975.23,7210 v1(1959.06,7226.17)
XSIG130033: C1214.2 R817.2 R1568.1 TP1612.1 U72.1 | length 501.7
  Top Layer w10: v1(1946.3,7030.94) 1935,7042.24 U72.1@1935,7110 R1568.1@2010,7110 R817.2@2010,7210
  Bottom Layer w10: TP1612.1@2000,6950 1946.3,7003.7 v1(1946.3,7030.94) 1946.3,7037.79 2034.95,7037.79 2040,7042.84 C1214.2@2040,7080
XSIG130045: C1215.1 C1216.1 D105.3 R823.2 R824.1 TP1011.1 U35.3 | length 587
  Top Layer w10: U35.3@1835,7610 1835,7671.74 1825.54,7681.21 v1(1825.54,7720.56) 1910,7720.56 R823.2@1910,7710
  Bottom Layer w10: R824.1@1710,7710 1710.82,7710.82 1741.79,7710.82 1751.54,7720.56 1779.14,7720.56 ; TP1011.1@1780,7760 1780,7721.43 1779.14,7720.56 ; D105.3@1800,7671.5 1793.72,7677.78 1793.72,7720.56 ; C1216.1@1965,7785 1955,7785 C1215.1@1900,7730 1834.97,7730 v1(1825.54,7720.56) 1793.72,7720.56 ; 1779.14,7720.56 1793.72,7720.56
XSIG130047: C1216.2 C1217.1 D104.3 R821.1 R822.2 TP1012.1 U35.2 | length 803.8
  Top Layer w10: U35.2@1885,7610 1885,7647.81 1900.19,7662.99 2004.97,7662.99 ; v1(1961.41,7724.88) 1961.41,7719.85 1971.26,7710 R822.2@2006.6,7710 ; R821.1@2010,7620 2004.97,7620 2004.97,7662.99 ; R822.2@2010,7710 R822.2@2006.6,7710 ; 2004.97,7662.99 2004.97,7665.03 2006.6,7666.66 R822.2@2006.6,7710
  Bottom Layer w10: C1217.1@1870,7460 1870,7534.16 1886.99,7551.14 1886.99,7618.64 1939.84,7671.5 D104.3@1970,7671.5 1970,7716.29 v1(1961.41,7724.88) 2021.53,7785 C1216.2@2025,7785 2025,7841.12 2015.56,7850.56 TP1012.1@2015,7850
XSIG130051: C1217.2 R821.2 R1569.1 TP1013.1 U35.1 | length 645.3
  Top Layer w10: R1569.1@1710,7460 1710,7466.45 1736.44,7492.89 1926.53,7492.89 1926.53,7493.23 1927.33,7492.43 1928.92,7492.43 1940,7481.35 v1@1940,7477.04 ; U35.1@1935,7610 1935,7567.86 1940.58,7562.29 1957.77,7562.29 1957.77,7560 ; v1(1940,7470) v1@1940,7477.04 ; R821.2@2010,7560 1957.77,7560 ; v1@1940,7477.04 1943.36,7473.68 1950,7473.68 1957.77,7481.44 1957.77,7560
  Bottom Layer w10: C1217.2@1870,7400 1902,7400 1929.32,7427.33 1929.32,7490.43 1940,7479.76 v1(1940,7470)
XSIG130065: C368.2 D89.3 R1599.2 R2339.1 TP1014.1 U90.5 | length 767.7
  Top Layer w10: v1(3112.26,7711.39) 3110.87,7710 R2339.1@3070,7710 3045.46,7710 3025.64,7690.18 3025.64,7471.5 3057.97,7439.16 3145,7439.16 U90.5@3145,7410
  Bottom Layer w10: TP1014.1@3005,7635 3010,7640 C368.2@3010,7710 R1599.2@3070,7710 3101,7710 3101.61,7709.39 3103.93,7709.39 v1@3112.26,7701.06 ; D89.3@3110,7611.5 3110,7651.22 3100.54,7660.68 3100.54,7685.53 3112.26,7697.24 v1@3112.26,7701.06 ; v1(3112.26,7711.39) v1@3112.26,7701.06
XSIG130075: C369.2 D90.3 R1600.2 R2340.1 TP1015.1 U88.5 | length 779.6
  Top Layer w10: C369.2@2610,7450 C369.2@2610,7451.5 ; v1(2665.42,7712.19) 2603.51,7712.19 2579,7687.68 2579,7461.9 2589.4,7451.5 C369.2@2610,7451.5 ; U88.5@2685,7410 2685,7444.17 2674.27,7454.89 2610,7454.89 C369.2@2610,7451.5
  Bottom Layer w10: TP1015.1@2550,7630 2550,7696.07 2563.93,7710 R2340.1@2580,7710 2665.42,7710 v1(2665.42,7712.19) 2667.62,7710 v1@2680,7710 ; D90.3@2680,7641.5 v1@2680,7710 ; R1600.2@2710,7710 v1@2680,7710
XSIG130086: C370.2 D91.3 R1601.2 R2341.1 TP1016.1 U202.5 | length 691.7
  Top Layer w10: U202.5@2685,6910 2685,6947.89 2672.63,6960.26 2587.94,6960.26 2571.25,6976.95 2571.25,7160.37 2610,7199.12 R2341.1@2610,7200 v1(2661.99,7200) C370.2@2710,7200
  Bottom Layer w10: TP1016.1@2620,7255 2661.99,7213.01 v1(2661.99,7200) R1601.2@2710,7200 D91.3@2710,7131.5
XSIG130097: C365.2 R1498.1 R1567.2 TP1017.1 U71.5 | length 577.4
  Top Layer w10: C365.2@1710,6390 1785,6390 U71.5@1785,6400 v1(1785,6462.19) 1921.19,6462.19 1960.67,6501.67 1960.67,6530.1 1980.57,6550 R1567.2@2010,6550
  Bottom Layer w10: R1498.1@1710,6450 1742.81,6450 1755,6462.19 v1(1785,6462.19) 1802.19,6445 TP1017.1@1850,6445
XSIG130101: C366.2 R1499.1 R1568.2 TP1018.1 U72.5 | length 572.3
  Top Layer w10: C366.2@1710,6890 1785,6890 U72.5@1785,6910 v1(1785,6994.49) 1954.49,6994.49 R1568.2@2010,7050
  Bottom Layer w10: v1(1785,6994.49) 1785,6985 1790,6980 R1499.1@1790,6950 1847.49,6950 1867.49,6970 TP1018.1@1880,6970
XSIG130105: C367.2 R1500.1 R1569.2 TP1019.1 U35.5 | length 300.6
  Top Layer w10: R1569.2@1710,7400 1741,7400 1754.24,7413.24 ; v1(1754.24,7462.89) 1754.24,7413.24 ; U35.5@1785,7410 1754.24,7410 1754.24,7413.24
  Bottom Layer w10: R1500.1@1710,7460 1741,7460 1745.82,7464.82 v1@1754.24,7464.82 ; v1(1754.24,7462.89) v1@1754.24,7464.82 ; TP1019.1@1810,7520 1807.63,7520 1805,7517.37 C367.2@1805,7460 1793.82,7460 1793.82,7464.82 v1@1754.24,7464.82
XSIG130123: R2516.1 TP1020.1 U202.6 | length 218.5
  Top Layer w10: v1(2675.5,6834.04) 2679.54,6830 R2516.1@2730,6830 2735,6835 U202.6@2735,6910
  Bottom Layer w10: v1(2675.5,6834.04) 2675.5,6865.5 TP1020.1@2710,6900
XSIG130126: R2519.1 TP1021.1 U88.6 | length 211.2
  Top Layer w10: v1(2723.51,7470.3) 2724.7,7470.3 2735,7460 U88.6@2735,7410 2735,7335 R2519.1@2730,7330
  Bottom Layer w10: v1(2723.51,7470.3) 2723.51,7451.49 TP1021.1@2755,7420
XSIG130129: R2518.1 TP1022.1 U90.6 | length 189.8
  Top Layer w10: v1(3151.26,7350) 3151.26,7348.74 3170,7330 R2518.1@3195,7330 ; U90.6@3195,7410 R2518.1@3195,7330 ; R2518.1@3200,7330 R2518.1@3195,7330
  Bottom Layer w10: v1(3151.26,7350) 3175,7350 TP1022.1@3195,7330
XSIG140020: C1230.1 C1231.1 D167.3 R849.2 R850.1 TP1024.1 U74.3 | length 558.8
  Top Layer w10: R850.1@2120,6700 C1230.1@2185,6700 ; v1(2176.21,6655.17) 2185,6663.97 C1230.1@2185,6700 ; U74.3@2275,6600 2275,6650.56 2256.64,6668.92 2256.64,6696.64 R849.2@2260,6700 ; C1231.1@2350,6700 R849.2@2260,6700 ; C1230.1@2185,6700 R849.2@2260,6700
  Bottom Layer w10: D167.3@2240,6621.5 2240,6625 2206.96,6658.04 v1@2189.82,6658.04 ; TP1024.1@2240,6710 2195.31,6665.31 2195.31,6663.53 v1@2189.82,6658.04 ; v1@2189.82,6658.04 2186.95,6655.17 v1(2176.21,6655.17) 2176.21,6658.04 v1@2189.82,6658.04
XSIG140036: C1234.2 C1235.1 D107.3 R827.1 R828.2 TP1025.1 U58.2 | length 664.7
  Top Layer w10: U58.2@2325,7110 2325,7152.51 2326.44,7153.95 2335,7162.51 2336.99,7164.5 2336.99,7184.03 2334.55,7186.46 2334.55,7192.11 2331.73,7192.11 v1@2331.73,7194.73 ; v1(2334.55,7194.73) v1@2331.73,7194.73 ; R828.2@2510,7230 2480,7260 R827.1@2450,7260 C1235.1@2390,7260 2390,7247.5 2350.89,7247.5 2331.73,7228.34 v1@2331.73,7194.73
  Bottom Layer w10: v1(2334.55,7194.73) 2367.78,7161.5 D107.3@2390,7161.5 2390,7285.64 2375.64,7300 C1234.2@2355,7300 2355,7333.34 2390.06,7368.39 2393.45,7365 TP1025.1@2395,7365
XSIG140038: C1233.1 C1234.1 D168.3 R845.1 R846.2 TP1026.1 U58.3 | length 621
  Top Layer w10: R845.1@2130,7200 2180.95,7200 ; v1(2180.95,7184.35) 2180.95,7200 ; U58.3@2275,7110 2275,7140.51 2250,7165.51 2250,7195 R846.2@2255,7200 2180.95,7200
  Bottom Layer w10: TP1026.1@2125,7240 2134.39,7230.61 2143.79,7240 C1233.1@2205,7240 ; v1(2180.95,7184.35) 2180.95,7186.99 2212.71,7186.99 ; D168.3@2240,7161.5 2218.18,7161.5 2212.71,7166.97 2212.71,7186.99 ; C1234.1@2355,7240 C1233.1@2205,7240 ; C1233.1@2205,7240 2205,7238.32 2212.71,7230.61 2212.71,7186.99
XSIG140054: C1237.2 C1238.1 D108.3 R829.1 R830.2 TP1027.1 U59.2 | length 591.4
  Top Layer w10: U59.2@2335,7610 2336.32,7610 2336.32,7656.49 2357.72,7677.89 2357.72,7710 R830.2@2360,7710 2361,7710 2367.17,7716.17 2408.74,7716.17 v1(2408.74,7724.89) 2408.74,7747.84 2430.9,7770 R829.1@2460,7770
  Bottom Layer w10: C1237.2@2295,7735 2332.72,7735 2372.72,7775 C1238.1@2395,7775 ; D108.3@2400,7671.5 2400,7716.14 v1(2408.74,7724.89) 2395,7738.63 C1238.1@2395,7775 ; TP1027.1@2445,7850 2442.52,7850 2438.02,7854.5 2395,7811.47 C1238.1@2395,7775
XSIG140056: C1236.1 C1237.1 D169.3 R847.1 R848.2 TP1028.1 U59.3 | length 544.4
  Top Layer w10: R847.1@2140,7710 2181.95,7710 2191.33,7700.62 v1(2191.33,7684.8) 2216.53,7710 R848.2@2260,7710 2260,7680 2279.24,7660.76 2279.24,7610 U59.3@2285,7610
  Bottom Layer w10: TP1028.1@2065,7700 2065,7702.63 2117.63,7702.63 C1236.1@2130,7715 2160.2,7684.8 v1(2191.33,7684.8) 2204.64,7671.5 D169.3@2250,7671.5 2235,7686.5 C1237.1@2235,7735
XSIG140077: C787.1 R1603.2 TP1031.1 U85.5 | length 448.7
  Top Layer w10: U85.5@7915,7410 7915,7460 7930,7475 v1(7978.63,7475) 7978.63,7488.26 8030.37,7540 R1603.2@8140,7540
  Bottom Layer w10: TP1031.1@7850,7465 7860,7475 C787.1@7928.5,7475 v1(7978.63,7475)
XSIG140084: C1221.1 C1222.1 D84.3 R798.2 R1607.1 R2559.1 TP1032.1 U85.3 | length 641.6
  Top Layer w10: U85.3@7965,7610 7965,7672.28 v1(7972.73,7680.02) 7979.02,7680.02 7984.52,7680.02 7989.51,7685 8015,7685 R1607.1@8015,7690 8046.85,7721.85 8046.85,7777.29 8040,7784.14 C1222.1@8040,7805
  Bottom Layer w10: TP1032.1@7845,7595 7845,7596.07 7846.24,7597.31 7854.37,7597.31 7910,7652.94 R2559.1@7910,7700 ; C1221.1@7845,7700 R2559.1@7910,7700 ; D84.3@7970,7631.5 7970,7677.28 v1(7972.73,7680.02) ; R798.2@8030,7700 7992.5,7700 7972.73,7680.23 v1(7972.73,7680.02) ; R2559.1@7910,7700 7929.98,7680.02 v1(7972.73,7680.02)
XSIG140120: C1226.2 R1314.2 R1535.1 TP1033.1 U79.1 | length 407.2
  Top Layer w10: v1(8482.28,7756) 8482.28,7730.22 8520,7692.5 R1314.2@8520,7690 8552.76,7690 8570,7672.76 R1535.1@8570,7630 8541.5,7630 8521.5,7610 U79.1@8495,7610
  Bottom Layer w10: v1(8482.28,7756) 8482.28,7758.53 8499.64,7775.88 8505,7775.88 ; TP1033.1@8505,7810 8505,7775.88 ; C1226.2@8575,7770 8575,7775.88 8505,7775.88
XSIG140124: C1225.2 C1226.1 D111.3 R833.2 R1314.1 TP1034.1 U79.2 | length 743.7
  Top Layer w10: v1(8434.87,7756.37) 8440,7751.24 R1314.1@8440,7690 8445,7685 U79.2@8445,7610
  Bottom Layer w10: R833.2@8240,7700 8269.17,7670.83 8399.33,7670.83 8412.08,7683.58 8412.08,7718.52 8434.87,7741.31 v1(8434.87,7756.37) ; TP1034.1@8420,7810 8420.96,7810.96 8434.87,7797.06 v1(8434.87,7756.37) ; D111.3@8570,7641.5 8575,7641.5 C1226.1@8575,7710 8575,7714.49 8553.5,7714.49 8534,7695 C1225.2@8510,7695 8510,7708.8 8492.8,7726 8465.24,7726 v1(8434.87,7756.37)
XSIG140125: C1224.1 C1225.1 D86.3 R800.2 R1315.1 TP92.1 U79.3 | length 655.1
  Top Layer w10: v1(8353.65,7534.81) 8369.81,7534.81 8372.99,7537.99 8395,7560 U79.3@8395,7610
  Bottom Layer w10: R800.2@8170,7700 8170,7682.19 8196.59,7655.61 8239.39,7655.61 8270,7625 D86.3@8270,7621.5 TP92.1@8363.5,7621.5 ; v1(8353.65,7534.81) 8363.84,7545 8363.84,7585 ; TP92.1@8365,7635 8363.5,7635 TP92.1@8363.5,7621.5 ; C1225.1@8450,7695 8450,7615 R1315.1@8465,7600 8450,7585 C1224.1@8400,7585 8363.84,7585 ; TP92.1@8363.5,7621.5 8363.5,7585 8363.84,7585
XSIG140135: C785.1 R1536.2 R1564.1 TP1036.1 U86.5 | length 499.5
  Top Layer w10: U86.5@8335,6910 8341.5,6910 8341.5,6963.62 v1@8350.59,6972.71 ; v1(8345,6970) 8345,6972.71 v1@8350.59,6972.71 ; R1536.2@8560,7000 8560,6996.29 8547.21,6983.5 8426.73,6983.5 8415.94,6972.71 v1@8350.59,6972.71
  Bottom Layer w10: R1564.1@8250,7020 C785.1@8250,6945 8322.88,6945 8350.59,6972.71 8345,6972.71 v1(8345,6970)
XSIG140142: C1227.1 C1228.1 D82.3 R796.2 R1317.1 TP1038.1 U86.3 | length 598.8
  Top Layer w10: v1(8345.78,7221.8) 8350.7,7221.8 8362.5,7210 R796.2@8400,7210 8401.25,7210 8401.25,7180.56 8380.7,7160.01 8380.7,7110 U86.3@8385,7110
  Bottom Layer w10: TP1038.1@8250,7155 D82.3@8360,7155 ; C1227.1@8280,7230 8337.57,7230 v1(8345.78,7221.8) 8350.31,7221.8 8360,7212.11 8360,7208.43 ; D82.3@8360,7151.5 D82.3@8360,7155 ; C1228.1@8495,7280 8430,7215 R1317.1@8430,7210 8427.5,7210 8425.93,7208.43 8360,7208.43 ; D82.3@8360,7155 8360,7208.43
XSIG140144: C784.1 R1535.2 R1579.1 TP1039.1 U79.5 | length 574.2
  Top Layer w10: U79.5@8345,7410 8345,7448.88 8361.65,7465.54 8411.37,7465.54 8415.83,7470 v1@8420.14,7470 ; v1(8420.14,7467.06) v1@8420.14,7470 ; R1535.2@8570,7570 8540.94,7570 8505.49,7534.55 8455.76,7534.55 8420.14,7498.93 8420.14,7475.67 v1@8420.14,7470
  Bottom Layer w10: TP1039.1@8220,7405 8225,7410 R1579.1@8280,7410 8280.69,7410.69 8350,7410.69 C784.1@8350,7415 8388.34,7415 8420.14,7446.8 v1(8420.14,7467.06)
XSIG140155: C786.1 R1602.2 TP1040.1 U33.5 | length 288.6
  Top Layer w10: R1602.2@8260,6380 8294.75,6380 8304.75,6390 U33.5@8335,6390 8335,6440 8326.66,6448.34 8323.83,6448.34 v1(8317.87,6454.3)
  Bottom Layer w10: TP1040.1@8270,6410 8317.87,6410 ; v1(8317.87,6454.3) 8317.87,6410 ; C786.1@8360,6405 8322.87,6405 8317.87,6410
XSIG140163: C371.2 R1501.2 R1570.1 TP1041.1 U74.5 | length 631.8
  Top Layer w10: C371.2@2120,6380 2120,6382.19 2225,6382.19 U74.5@2225,6400 2225,6440 ; v1(2172.07,6440) 2225,6440 ; R1501.2@2460,6550 2307.35,6550 2225,6467.65 2225,6440
  Bottom Layer w10: R1570.1@2120,6440 v1(2172.07,6440) 2177.07,6435 TP1041.1@2235,6435
XSIG140171: C373.2 R1503.2 R1578.1 TP1042.1 U59.5 | length 587.4
  Top Layer w10: C373.2@2140,7400 2235,7400 U59.5@2235,7410 2232.78,7410 v1(2232.78,7500.68) 2379.12,7500.68 2428.43,7550 R1503.2@2460,7550
  Bottom Layer w10: TP1042.1@2140,7450 R1578.1@2230,7450 2230,7497.91 v1(2232.78,7500.68)
XSIG140182: C1235.2 R827.2 R1502.1 TP1043.1 U58.1 | length 402.3
  Top Layer w10: U58.1@2375,7110 2377.57,7110 2377.57,7156 2390,7168.43 C1235.2@2390,7200 R827.2@2450,7200 2468.93,7200 2476.61,7192.32 2476.61,7153.09 v1(2476.44,7152.93) 2450,7152.93 R1502.1@2450,7110
  Bottom Layer w10: TP1043.1@2455,7250 2455,7174.36 v1(2476.44,7152.93)
XSIG140183: C372.2 R1502.2 R1571.1 TP1044.1 U58.5 | length 616
  Top Layer w10: C372.2@2140,6950 2189.34,6950 v1(2218.06,6978.72) ; U58.5@2225,6910 2225,6971.78 v1(2218.06,6978.72) ; R1502.2@2450,7050 2450,7052.72 2262.06,7052.72 2218.06,7008.72 v1(2218.06,6978.72)
  Bottom Layer w10: R1571.1@2130,6950 2189.34,6950 v1(2218.06,6978.72) 2225,6971.78 TP1044.1@2225,6910
XSIG140193: C1238.2 R829.2 R1503.1 TP1045.1 U59.1 | length 353.5
  Top Layer w10: U59.1@2385,7610 R1503.1@2460,7610 v1(2460,7658.28) R829.2@2460,7710
  Bottom Layer w10: C1238.2@2455,7775 2455,7731.17 2460.9,7725.27 ; v1(2460,7658.28) 2460,7724.37 2460.9,7725.27 ; TP1045.1@2515,7725 2515,7722.36 2513.72,7721.08 2465.09,7721.08 2460.9,7725.27
XSIG140197: C1218.1 C1219.1 D83.3 R797.2 R1605.1 R2558.1 TP1030.1 U33.3 | length 1015.5
  Top Layer w10: R797.2@8300,6740 8300,6730 R1605.1@8360,6670 8360,6652.17 8385,6627.17 U33.3@8385,6590 8385,6535.93 v1(8353.04,6503.97)
  Bottom Layer w10: TP1030.1@8180,6405 8170.44,6405 8170.44,6445.98 8194.37,6469.91 ; C1219.1@8435,6665 8375,6665 C1218.1@8370,6670 8370,6636.22 8313.3,6579.52 8287.71,6579.52 8218.19,6510 R2558.1@8195,6510 8194.37,6509.37 8194.37,6469.91 ; D83.3@8440,6488.5 8405,6488.5 8389.53,6503.97 v1(8353.04,6503.97) 8315.88,6503.97 8267.29,6455.38 8208.91,6455.38 8194.37,6469.91
XSIG140199: C1219.2 C1220.1 D109.3 R831.2 R1604.1 R2561.1 TP1029.1 U33.2 | length 722.1
  Top Layer w10: v1(8347.5,6736.11) 8358.61,6736.11 8362.5,6740 R831.2@8400,6740 R831.2@8417.5,6740 ; U33.2@8435,6590 8428.5,6590 8428.5,6640.4 8420,6648.9 R1604.1@8420,6670 8417.5,6670 R831.2@8417.5,6740 ; R2561.1@8470,6820 8470,6805.97 8417.5,6753.47 R831.2@8417.5,6740
  Bottom Layer w10: v1(8347.5,6736.11) 8377.5,6736.11 8385.11,6728.5 D109.3@8450,6728.5 8473.6,6728.5 8495,6707.1 C1219.2@8495,6665 8552.42,6665 8556.21,6661.21 C1220.1@8560,6665 8560,6698.94 8607.02,6745.96 8607.02,6760 TP1029.1@8605,6760
XSIG140204: C1228.2 C1229.1 D112.3 R834.2 R1316.1 TP1037.1 U86.2 | length 725.6
  Top Layer w10: U86.2@8435,7110 8435,7151.08 8466.27,7182.36 8466.27,7210 R834.2@8480,7210 8509.38,7210 8535.57,7236.19 v1(8535.57,7245)
  Bottom Layer w10: D112.3@8510,7151.5 8510,7205 C1228.2@8495,7220 8529.69,7220 8535.57,7225.88 v1(8535.57,7245) 8535.57,7273.59 8561.97,7300 TP1037.1@8595,7300 8648.43,7300 8670,7278.43 R1316.1@8670,7215 8645.24,7190.24 8645.24,7144.97 8670,7120.2 C1229.1@8670,7095
XSIG140206: C1229.2 R1316.2 R1536.1 TP1035.1 U86.1 | length 514.3
  Top Layer w10: U86.1@8485,7110 8485,7072.49 8497.49,7060 R1536.1@8560,7060 v1(8517.72,7017.72)
  Bottom Layer w10: v1(8517.72,7017.72) 8540.44,6995 TP1035.1@8610,6995 C1229.2@8610,7095 8598.32,7095 8598.32,7206.68 R1316.2@8590,7215
XSIG140217: C1222.2 C1223.1 D110.3 R832.2 R1606.1 R2560.1 TP1613.1 U85.2 | length 946.6
  Top Layer w10: U85.2@8015,7610 8015,7637.55 8069.73,7692.28 8069.73,7774.73 C1222.2@8100,7805 8130.28,7805 8160,7775.28 R1606.1@8160,7745 8179.47,7745 8199.07,7725.41 8199.07,7685 8190,7685 8200,7675 R2560.1@8205,7675 8205,7652.28 v1(8180.5,7627.78) 8175.54,7627.78 8181.63,7621.69 8183.72,7621.69 8200.59,7604.81 8200.59,7590.65 8205,7586.24 C1223.1@8205,7585
  Bottom Layer w10: TP1613.1@8065,7430 8065,7482.91 8053.1,7494.81 8053.1,7573.81 D110.3@8110.79,7631.5 ; R832.2@8100,7700 8100,7638.73 8107.23,7631.5 D110.3@8110.79,7631.5 ; v1(8180.5,7627.78) 8175.54,7627.78 8175.54,7631.5 D110.3@8130,7631.5 8130,7631.96 8111.25,7631.96 D110.3@8110.79,7631.5
XSIG140224: C1231.2 C1232.1 D106.3 R825.1 R826.2 TP1023.1 U74.2 | length 593.3
  Top Layer w10: U74.2@2325,6600 2325,6636.23 2350.87,6662.1 2374.46,6662.1 2385.6,6673.23 2385.6,6679.59 ; C1231.2@2350,6760 2385.6,6760 ; v1(2413.43,6683.3) 2413.43,6679.86 2408.39,6674.82 2403.62,6679.59 2385.6,6679.59 ; R826.2@2520,6820 C1232.1@2520,6760 R825.1@2460,6760 2440,6760 2385.6,6760 ; 2385.6,6679.59 2385.6,6760
  Bottom Layer w10: TP1023.1@2395,6730 2395,6683.3 ; D106.3@2400,6621.5 2400,6676.38 2395,6681.38 2395,6683.3 ; v1(2413.43,6683.3) 2395,6683.3
XSIG150003: D125.1 R1455.1 TP1046.1 | length 262.9
  Top Layer w10: R1455.1@7840,5940 7873.26,5940 7893.62,5960.36 v1(7893.62,5973.2) 7893.62,6094.5 7887.5,6100.62 D125.1@7887.5,6101.5
  Bottom Layer w10: TP1046.1@7860,5930 7893.62,5963.62 v1(7893.62,5973.2)
XSIG150005: D70.2 D175.3 TP1047.1 | length 303.2
  Top Layer w10: D175.3@7820,5651.5 7880.65,5651.5 v1(7883.98,5648.18) 7883.98,5606.74 7900,5590.71 D70.2@7900,5473.5
  Bottom Layer w10: TP1047.1@7835,5630 7865.8,5630 v1(7883.98,5648.18)
XSIG150008: C544.2 D127.3 R1489.2 R1612.2 TP1048.1 U31.5 | length 1172
  Top Layer w10: U31.5@7555,5370 7555,5457.64 7518.21,5494.43 7518.21,5930.87 7528.71,5941.37 R1612.2@7577.65,5941.37 ; R1612.2@7570,5950 R1612.2@7572.5,5950 ; C544.2@7660,5940 7660,5941.37 R1612.2@7577.65,5941.37 ; R1489.2@7760,6200 7757.5,6200 7689,6131.5 D127.3@7610,6131.5 7610,6020.37 7589.63,6000 v1(7580,6000) 7573.03,6000 7573.03,5962.51 7572.5,5961.98 R1612.2@7572.5,5950 ; R1612.2@7572.5,5950 7572.5,5946.52 R1612.2@7577.65,5941.37
  Bottom Layer w10: TP1048.1@7580,5950 v1(7580,6000)
XSIG150011: D127.1 R1454.1 TP106.1 | length 1106.8
  Top Layer w10: v1(7514.72,5455.49) 7498.21,5472 7498.21,6032.9 7513.81,6048.5 D127.1@7572.5,6048.5 ; v1(7750.79,5483.17) 7753.96,5480 R1454.1@7810,5480
  Bottom Layer w10: TP106.1@7475,5480 7499.51,5455.49 v1(7514.72,5455.49) 7514.72,5514.81 7525.88,5525.97 7731.39,5525.97 7750.79,5506.57 v1(7750.79,5483.17)
XSIG150013: D175.2 R1454.2 TP1049.1 U31.7 | length 494.9
  Top Layer w10: U31.7@7655,5370 7655,5420 7665.61,5430.61 v1@7749.97,5430.61 ; v1(7749.97,5418.44) v1@7749.97,5430.61 ; D175.2@7857.5,5568.5 7857.5,5445 7812.5,5400 R1454.2@7810,5400 7807.5,5400 7776.89,5430.61 v1@7749.97,5430.61
  Bottom Layer w10: v1(7749.97,5418.44) 7766.25,5418.44 7792.81,5445 TP1049.1@7810,5445
XSIG150019: C543.2 D125.3 R1488.2 R1611.2 TP105.1 U31.3 | length 1970.7
  Top Layer w10: U31.3@7605,5570 7605,5663.5 7660,5718.5 C543.2@7660,5720 R1611.2@7760,5720 7780.9,5720 7810.46,5749.56 7810.46,5813.25 7792.5,5831.21 v1(7792.5,5948.23) 7788.89,5948.23 7788.89,6000.58 7799,6010.69 7850,6010.69 D125.3@7850,6018.5 ; v1(8017.96,6146.41) 8017.96,6207.39 8155.84,6345.28 8155.84,6641.62 8201,6686.78 8201,7006.5 8187.5,7020 R1488.2@8150,7020
  Bottom Layer w10: v1(7792.5,5948.23) 7854.52,6010.25 7855.25,6010.25 TP105.1@7880,6035 7970.2,6125.2 7996.74,6125.2 v1(8017.96,6146.41)
XSIG150039: D175.1 R1455.2 TP1050.1 U31.1 | length 520.3
  Top Layer w10: U31.1@7705,5570 7705,5620 7712.13,5627.13 v1(7744.12,5627.13) 7778.41,5627.13 7782.5,5631.23 ; D175.1@7782.5,5568.5 7782.5,5631.23 ; R1455.2@7840,5860 7840,5736.25 7782.5,5678.75 7782.5,5631.23
  Bottom Layer w10: v1(7744.12,5627.13) 7744.12,5590.88 TP1050.1@7770,5565
XSIG150053: D70.1 R1422.1 TP1051.1 | length 195
  Top Layer w10: R1422.1@7900,5280 7900,5315 v1@7918.68,5333.68 ; D70.1@7900,5386.5 7900,5351.5 7917.82,5333.68 v1@7918.68,5333.68 ; v1(7919.49,5333.68) v1@7918.68,5333.68
  Bottom Layer w10: TP1051.1@7900,5270 7900,5314.19 v1(7919.49,5333.68)
XSIG150054: C374.2 Q18.1 R1358.2 R1422.2 TP1614.1 | length 3401.5
  Top Layer w10: R1422.2@7900,5200 7902.5,5200 7913.88,5188.62 7913.88,5142.72 7900,5128.84 7900,4947.66 7865.93,4913.59 7865.93,4628.44 7920.15,4574.21 7920.15,4531.58 7944.08,4507.65 7944.08,4431.75 7963.17,4412.66 7963.17,3832.77 8051.06,3744.87 8051.06,3223.73 7954.7,3127.36 7954.7,3065.12 7975.7,3044.11 7975.7,2710.93 7945.56,2680.8 v1(7943.49,2680.8)
  Bottom Layer w10: v1(7943.49,2680.8) 7943.49,2446.19 7923.65,2426.35 TP1614.1@7920,2430 7867.49,2377.49 7867.49,2296.51 Q18.1@7892.5,2271.5 7932.65,2231.35 7969.45,2231.35 8005.79,2195 C374.2@8030,2195 8085,2140 R1358.2@8095,2140